# Altium PCB PCB_Layout.PcbDoc
Units mil, origin at the board's own origin, x right, y up, seen from the top; angles counter-clockwise.
Board outline 6000 x 4000 mil, 2 copper layers (Top Layer, Bottom Layer); 34 components, 41 nets, 148 pads, 1 vias.
Unrouted connection lines stored in the file: 29.
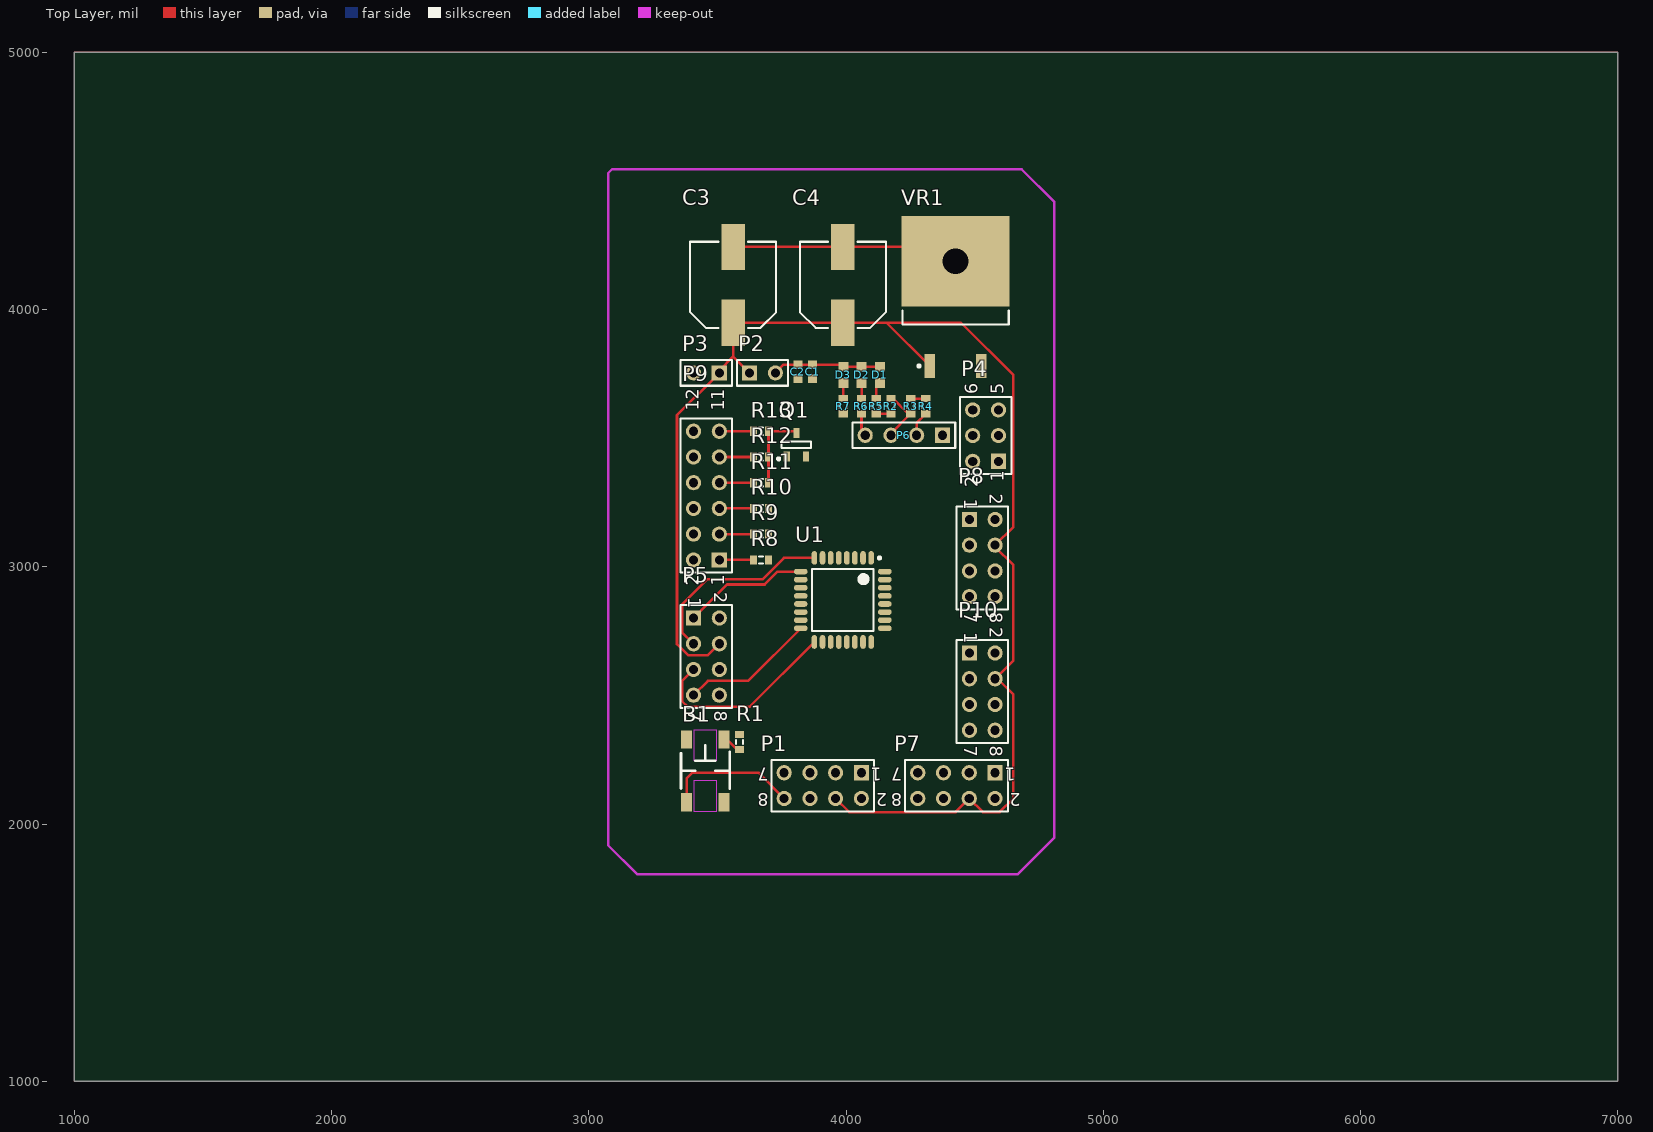
[diagram p0: Top Layer view]
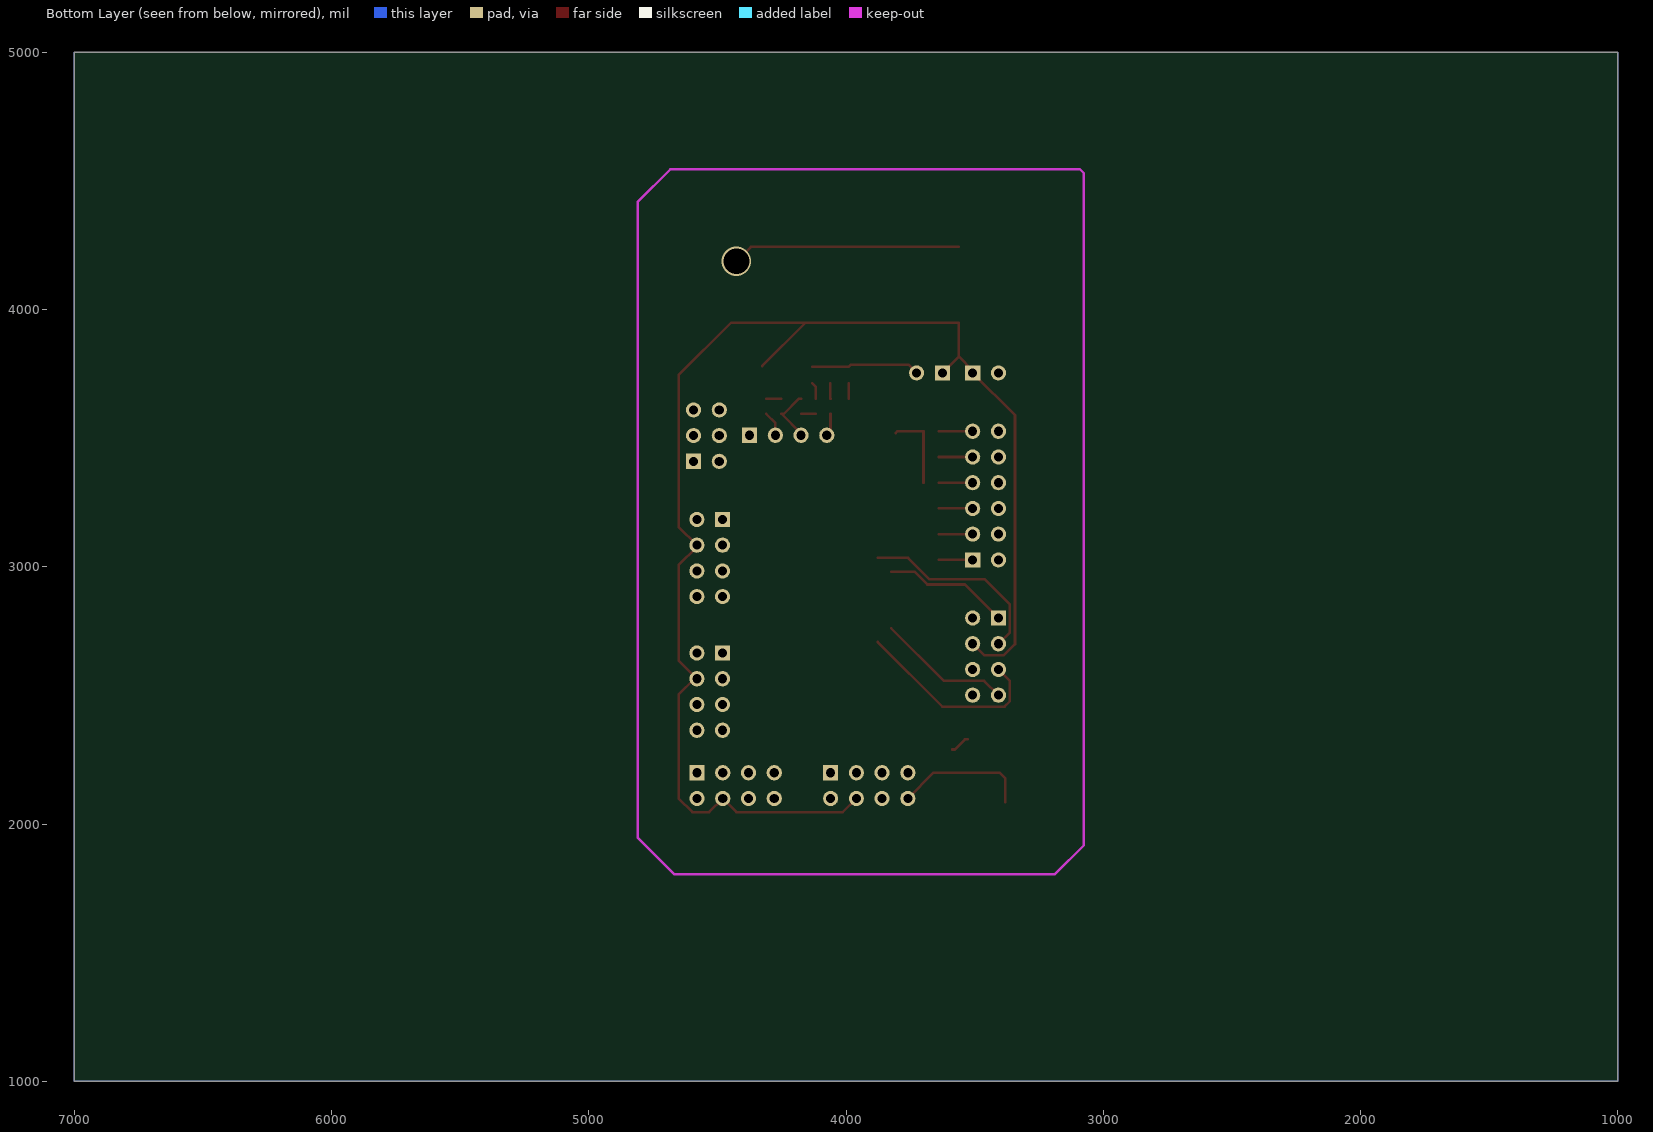
[diagram p1: Bottom Layer view, seen from below]

## Layer stack, top to bottom
Top Solder: solder mask 0.4, Solder Resist, Dk 3.5
Top Layer: signal copper 1.4
Dielectric 1: dielectric 12.6, FR-4, Dk 4.8
Bottom Layer: signal copper 1.4
Bottom Solder: solder mask 0.4, Solder Resist, Dk 3.5

## Board outline
1000,1000 7000,1000 7000,5000 1000,5000

## Design rules (kind name [scope] priority, off if disabled: settings)
Clearance [All] p1: gap=10
PolygonConnect [All] p1: connectstyle=Relief reliefconductorwidth=10 reliefentries=4 polygonreliefangle="90 Angle" airgapwidth=10
RoomDefinition PCB_Schematic [InComponentClass('PCB_Schematic')] p1: confinementstyle=ConfineIn formatcopy=TRUE lockcomponents=FALSE outline 7180.12,1692.91 4998.03,1692.91 4998.03,3157.48 7180.12,3157.48
RoutingVias [All] p1: holewidth=28 width=50 viastyle="Through Hole" minholewidth=28 minwidth=50 maxholewidth=28 maxwidth=50
SolderMaskExpansion [All] p1: expansion=4
Width [All] p1: maxlimit=10 minlimit=10 preferedwidth=10
30 further rules are at their usual default settings.

## Components (designator, comment, footprint, x,y, rotation, side; value= is the part's Value field where it differs from the comment)
B1 "Button" "SMT Tactile Button" 3453.07,2206.82 r90 top
C1 "Cap" 1608[0603] 3870.23,3758.45 r270 top
C2 "Cap" 1608[0603] 3812.97,3758.45 r270 top
C3 "Cap Pol2" CAPAE9983X105M 3561.26,4096.22 r90 top
C4 "Cap Pol2" CAPAE9983X105M 3987.88,4096.22 r90 top
D1 "LED1" L0603 4131.87,3745.66 r90 top
D2 "LED1" L0603 4060.84,3745.66 r90 top
D3 "LED1" L0603 3989.8,3745.66 r90 top
P1 "Header 4X2" HDR2X4 4059.68,2199.28 r180 top
P2 "Header 2" HDR1X2 3625.4,3753.73 r0 top
P3 "Header 2" HDR1X2 3507.52,3753.73 r180 top
P4 "Header 3X2" HDR2X3 4592.58,3409.89 r90 top
P5 "Header 4X2" HDR2X4 3407.52,2800.8 r270 top
P6 "Header 4" HDR1X4 4374.69,3511.27 r180 top
P7 "Header 4X2" HDR2X4 4579.02,2199.28 r180 top
P8 "Header 4X2" HDR2X4 4479.78,3183.88 r270 top
P9 "Header 6X2" HDR2X6 3507.52,3026.81 r90 top
P10 "Header 4X2" HDR2X4 4479.78,2664.55 r270 top
Q1 "MOSFET-P" SOT23-3 3807.11,3474.41 r90 top
R1 "Res3" J1-0603 3586.19,2319.09 r90 top
R2 "Res3" J1-0603 4174.64,3624.43 r90 top
R3 "Res3" J1-0603 4251.58,3624.43 r90 top
R4 "Res3" J1-0603 4310.13,3624.43 r270 top
R5 "Res3" J1-0603 4117.38,3624.43 r270 top
R6 "Res3" J1-0603 4060.13,3624.43 r270 top
R7 "Res3" J1-0603 3989.45,3624.43 r270 top
R8 "Res3" J1-0603 3669.14,3026.81 r0 top
R9 "Res3" J1-0603 3669.14,3126.81 r0 top
R10 "Res3" J1-0603 3669.14,3226.81 r0 top
R11 "Res3" J1-0603 3669.14,3326.81 r0 top
R12 "Res3" J1-0603 3669.14,3426.81 r0 top
R13 "Res3" J1-0603 3669.14,3526.81 r0 top
U1 "ATmega32M1-AU" 32A_L 3987.48,2871.1 r270 top
VR1 "Volt Reg" D2PAK_N 4426.04,4047.99 r90 top

## Footprints (in the part's own frame and the unit in brackets; to place one, negate y for a bottom-side part, rotate by r counter-clockwise, add the part's x,y. Pads: shape width x height; smd on the part's side, far side on the other; paste and mask are expansions set on the pad)
32A_L [mm] "Thin QFP, 32-Leads, Body 7x7mm, Pitch 0.8mm, IPC High Density"
  oval 1.35x0.55 smd: 1(-4.15,2.8) 2(-4.15,2) 3(-4.15,1.2) 4(-4.15,0.4) 5(-4.15,-0.4) 6(-4.15,-1.2) 7(-4.15,-2) 8(-4.15,-2.8) 17(4.15,-2.8) 18(4.15,-2) 19(4.15,-1.2) 20(4.15,-0.4) 21(4.15,0.4) 22(4.15,1.2) 23(4.15,2) 24(4.15,2.8)
  oval 0.55x1.35 smd: 9(-2.8,-4.15) 10(-2,-4.15) 11(-1.2,-4.15) 12(-0.4,-4.15) 13(0.4,-4.15) 14(1.2,-4.15) 15(2,-4.15) 16(2.8,-4.15) 25(2.8,4.15) 26(2,4.15) 27(1.2,4.15) 28(0.4,4.15) 29(-0.4,4.15) 30(-1.2,4.15) 31(-2,4.15) 32(-2.8,4.15)
  silkscreen extent -4.27,-3.05 3.05,3.75, body extent -3.5,-3.5 3.5,3.5, height 1.2
1608[0603] [mm] "Chip Capacitor, Body 1.6x0.8mm, IPC High Density"
  rect 0.8x0.9 smd: 1(-0.7,0) 2(0.7,0)
  body extent -0.87,-0.48 0.87,0.48, height 1.3
CAPAE9983X105M [mm] "Aluminum Electrolytic Capacitor, Body 8.30x8.30x10.50mm, IPC Low Density"
  rect 4.55x2.3 smd: 1(-3.75,0) 2(3.75,0)
  silkscreen extent -4.25,-4.25 4.25,4.25, body extent -4.25,-4.25 4.25,4.25, height 10.5
D2PAK_N [mm] "D2-PAK, 4-Leads, Body 8.8x10.4mm, Pitch 2.54mm, Lead Span 15.1mm, IPC Medium Density"
  rect 2.4x1.05 smd: 1(-6.8,2.54) 3(-6.8,-2.54)
  rect 8.9x10.65 smd: 2(3.55,0)
  silkscreen extent -6.92,-5.25 -1.3,5.25, body extent -2.7,-5.28 6.3,5.28, height 4.69
HDR1X2 [mm] "Connector; Header; 2 Position"
  rect 1.5x1.5 hole 0.9: 1(0,0)
  round 1.5 hole 0.9: 2(2.54,0)
  silkscreen extent -1.27,-1.27 3.81,1.27
HDR1X4 [mm] "Connector; Header; 4 Position"
  rect 1.5x1.5 hole 0.9: 1(0,0)
  round 1.5 hole 0.9: 2(2.54,0) 3(5.08,0) 4(7.62,0)
  silkscreen extent -1.27,-1.27 8.89,1.27
HDR2X3 [mm] "Connector; Header; 3x2 Position"
  rect 1.5x1.5 hole 0.9: 1(0,0)
  round 1.5 hole 0.9: 2(0,2.54) 3(2.54,0) 4(2.54,2.54) 5(5.08,0) 6(5.08,2.54)
  silkscreen extent -1.27,-1.27 6.35,3.81
HDR2X4 [mm] "Connector; Header; 4x2 Position"
  rect 1.5x1.5 hole 0.9: 1(0,0)
  round 1.5 hole 0.9: 2(0,2.54) 3(2.54,0) 4(2.54,2.54) 5(5.08,0) 6(5.08,2.54) 7(7.62,0) 8(7.62,2.54)
  silkscreen extent -1.27,-1.27 8.89,3.81
HDR2X6 [mm] "Connector; Header; 6x2 Position"
  rect 1.5x1.5 hole 0.9: 1(0,0)
  round 1.5 hole 0.9: 2(0,2.54) 3(2.54,0) 4(2.54,2.54) 5(5.08,0) 6(5.08,2.54) 7(7.62,0) 8(7.62,2.54) 9(10.16,0) 10(10.16,2.54) 11(12.7,0) 12(12.7,2.54)
  silkscreen extent -1.27,-1.27 13.97,3.81
J1-0603 [mm] "Chip Resistor, Body 1.6x0.8mm, IPC High Density"
  rect 0.7x0.9 smd: 1(-0.75,0) 2(0.75,0)
  silkscreen extent -0.2,-0.35 0.2,0.35, body extent -0.85,-0.48 0.85,0.48, height 0.9
L0603 [mm]
  rect 0.95x1 smd: 1(-0.8,0) 2(0.8,0)
"SMT Tactile Button" [mm]
  rect 1.8x1.1 smd: 1(3.1,1.85) 2(-3.1,1.85) 3(-3.1,-1.85) 4(3.1,-1.85)
  Top Layer keep-out region: -4,-1.125 -1,-1.125 -1,1.125 -4,1.125
  Top Layer keep-out region: 1.025,-1.125 4.025,-1.125 4.025,1.125 1.025,1.125
  silkscreen extent -1.75,-2.4 2.5,2.4
SOT23-3 [mm]
  rect 1x0.6 smd: 1(-1.15,0.95) 2(-1.15,-0.95) 3(1.15,0)
  silkscreen extent -1.52,-1.45 0.33,1.87

## Part data
B1: library part Switch
C1 C2: "Capacitor"
C3 C4: "Polarized Capacitor (Axial)"
D1 D2 D3: "Typical RED GaAs LED"
P1 P5 P7 P8 P10: "Header, 4-Pin, Dual row"
P2 P3: "Header, 2-Pin"
P4: "Header, 3-Pin, Dual row"
P6: "Header, 4-Pin"
P9: "Header, 6-Pin, Dual row"
Q1: "P-Channel MOSFET"
R1 R2 R3 R4 R5 R6 R7 R8 R9 R10 R11 R12 R13: "Resistor"
U1: "8-bit AVR Microcontroller, 2.7-5.5V, 16MHz, 32KB Flash, 1KB EEPROM, 2KB SRAM, Industrial Grade (-40° to +85°C), 32-Pin TQFP"
VR1: "Voltage Regulator"

## Via types
v1: diameter 114, hole 100, Top Layer to Bottom Layer, 1 vias

## Nets (pads, with @x,y where several pads share a name; then routed paths per layer and width w, separated by ;. In a path a pad name is that pad's centre, name@x,y a point inside that pad or via, vN(x,y) a via of type N, cw(c..) or ccw(c..) an arc to the next point about the centre after c; other vN are vias at no path point)
3S(11.1V): C3.1 C4.1 P1.4 P2.1 P3.1 P5.4 P7.4 P8.4 P10.4 VR1.1 | length 5590.5
  Top Layer w10: P5.4 3462.99,2656.27 3386.05,2656.27 3342.99,2699.33 3342.99,3589.2 P3.1 3507.52,3763.43 3561.26,3817.17 3561.26,3817.87 ; P2.1 3561.26,3817.87 ; P1.4 4012.7,2046.26 4426,2046.26 P7.4 4532.03,2046.26 4597.44,2046.26 4650.59,2099.41 4650.59,2503.94 4589.98,2564.54 P10.4 4650.59,2635.35 4650.59,3006.89 4579.78,3077.7 P8.4 4650.59,3154.68 4650.59,3744.86 4446.86,3948.58 4157.74,3948.58 ; VR1.1 4157.74,3948.58 ; 3561.26,3817.87 C3.1 C4.1 4157.74,3948.58
5V: C1.2 C2.2 P1.2 P4.2 P5.2 P6.1 P7.2 P8.2 P10.2 Q1.1 R1.2 R8.2 R9.2 R10.2 U1.4 U1.19 VR1.3
GND: B1.2 C1.1 C2.1 C3.2 C4.2 D1.2 D2.2 D3.2 P1.8 P2.2 P3.2 P4.6 P5.8 P6.2 P7.8 P8.8 P9.2 P9.4 P9.6 P9.8 P9.10 P9.12 P10.8 R4.2 U1.5 U1.20 VR1.2 | length 1932.3
  Top Layer w10: B1.2 3380.24,2176.5 3403.54,2199.8 3659.16,2199.8 P1.8 ; C3.2 C4.2 4369.94,4243.86 v1(4426.04,4187.76) ; P2.2 3757.69,3786.01 C2.1 C1.1 3980.95,3786.01 D3.2 D2.2 D1.2 ; P6.2 4274.7,3559.47 R4.2
HI-BEAM: Q1.2 U1.15
M1.1: P5.5 U1.17 | length 769.1
  Top Layer w10: P5.5 3362.99,2556.27 3362.99,2477.24 3383.96,2456.27 3625.8,2456.27 U1.17
M1.2: P5.7 U1.16 | length 524.3
  Top Layer w10: P5.7 3462.99,2556.27 3619.5,2556.27 U1.16
M2.1: P7.5 U1.24
M2.2: P7.7 U1.23
M3.1: P8.5 U1.26
M3.2: P8.7 U1.7
M4.1: P10.5 U1.32
M4.2: P10.7 U1.18
MISO: P4.1 P5.3 P8.1 U1.8 | length 760.7
  Top Layer w10: P5.3 3362.99,2745.33 3362.99,2854.13 3459.96,2951.1 3675.68,2951.1 3759.06,3034.49 U1.8
MOSI: P4.4 P5.1 U1.9 | length 491.4
  Top Layer w10: P5.1 3537.82,2931.1 3683.96,2931.1 3734.2,2981.34 U1.9
NetD1_1: D1.1 R5.1 | length 66.2
  Top Layer w10: R5.1 4117.38,3699.68 D1.1
NetD2_1: D2.1 R6.1 | length 60.5
  Top Layer w10: R6.1 4060.84,3654.67 D2.1
NetD3_1: D3.1 R7.1 | length 60.4
  Top Layer w10: R7.1 3989.8,3654.31 D3.1
NetQ1_3: Q1.3 R11.2 R12.2 R13.2 | length 311.4
  Top Layer w10: R11.2 R12.2 R13.2 3799.99,3526.81 Q1.3
NetR3_2: R3.2 R4.1 | length 58.6
  Top Layer w10: R3.2 R4.1
PULSE: R7.2 U1.11
PWMM2.1: P7.1 U1.10
PWMM2.2: P7.3 U1.1
PWMM3.1: U1.3
PWMM3.2: P8.3 U1.27
PWMM4.1: P4.3 P10.1 U1.30
PWMM4.2: P10.3 U1.28
PWMM5.1: U1.29
RESET: B1.4 P4.5 R1.1 U1.31 | length 76.6
  Top Layer w10: B1.4 3537.28,2328.87 3576.58,2289.56 R1.1
RXD: P6.4 R6.2 U1.12 | length 89.7
  Top Layer w10: R6.2 4060.13,3525.84 P6.4
S1-IN1: P1.1 U1.22
S1-IN2: P1.3 U1.25
S1-IN3: P1.5 U1.13
S1-IN4: P1.7 U1.14
TORCH1: P9.1 R8.1 | length 132.1
  Top Layer w10: P9.1 R8.1
TORCH2: P9.3 R9.1 | length 132.1
  Top Layer w10: P9.3 R9.1
TORCH3: P9.5 R10.1 | length 132.1
  Top Layer w10: P9.5 R10.1
TORCH4: P9.7 R11.1 | length 132.1
  Top Layer w10: P9.7 R11.1
TORCH5: P9.9 R12.1 | length 132.1
  Top Layer w10: P9.9 R12.1
TORCH6: P9.11 R13.1 | length 132.1
  Top Layer w10: P9.11 R13.1
TXD: R2.1 R5.2 U1.2 | length 57.3
  Top Layer w10: R5.2 R2.1
TXD_3.3V: P6.3 R2.2 R3.1 | length 216.9
  Top Layer w10: R2.2 4182.66,3653.96 4241.71,3594.9 R3.1 4174.7,3518.02 P6.3
pads on no net: B1.1 B1.3 P1.6 P5.6 P7.6 P8.6 P10.6 U1.6 U1.21

## Polygon pours and split planes (outlines as drawn)
5V on Top Layer "POWER_Polygon" (solid, remove dead copper, shelved, pour order 0): 1000,1000 7000,1000 7000,5000 1000,5000
GND on Bottom Layer "GND_Polygon" (solid, remove dead copper, shelved, pour order 2): 1000,1000 7000,1000 7000,5000 1000,5000

## Keep-outs
Keep-Out Layer:
  lines w10: 3075.79,1917.32 3187.99,1805.12 4668.31,1805.12 4810.04,1946.85 4810.04,4418.31 4683.07,4545.28 3090.55,4545.28 3075.79,4530.51 3075.79,1917.32

## Text inside footprints (layer, text, board x,y; h text height)
P1: Top Overlay "2" at 4159.68,2119.28 h50 r180; Top Overlay "1" at 4139.68,2219.28 h50 r180; Top Overlay "7" at 3699.68,2219.28 h50 r180; Top Overlay "8" at 3699.68,2119.28 h50 r180
P4: Top Overlay "6" at 4512.58,3669.89 h50 r90; Top Overlay "5" at 4612.58,3669.89 h50 r90; Top Overlay "2" at 4512.58,3309.89 h50 r90; Top Overlay "1" at 4612.58,3329.89 h50 r90
P5: Top Overlay "2" at 3487.52,2900.8 h50 r270; Top Overlay "1" at 3387.52,2880.8 h50 r270; Top Overlay "7" at 3387.52,2440.8 h50 r270; Top Overlay "8" at 3487.52,2440.8 h50 r270
P7: Top Overlay "2" at 4679.02,2119.28 h50 r180; Top Overlay "1" at 4659.02,2219.28 h50 r180; Top Overlay "7" at 4219.02,2219.28 h50 r180; Top Overlay "8" at 4219.02,2119.28 h50 r180
P8: Top Overlay "2" at 4559.78,3283.88 h50 r270; Top Overlay "1" at 4459.78,3263.88 h50 r270; Top Overlay "7" at 4459.78,2823.88 h50 r270; Top Overlay "8" at 4559.78,2823.88 h50 r270
P9: Top Overlay "12" at 3427.52,3606.81 h50 r90; Top Overlay "1" at 3527.52,3646.81 h50 r90; Top Overlay "1" at 3527.52,3606.81 h50 r90; Top Overlay "1" at 3527.52,2926.81 h50 r90; Top Overlay "2" at 3427.52,2926.81 h50 r90
P10: Top Overlay "2" at 4559.78,2764.55 h50 r270; Top Overlay "1" at 4459.78,2744.55 h50 r270; Top Overlay "7" at 4459.78,2304.55 h50 r270; Top Overlay "8" at 4559.78,2304.55 h50 r270